# Altium PCB C2Sv1.PcbDoc (part 2 of 2)
Units mm, origin at the board's own origin, x right, y up, seen from the top; angles counter-clockwise.
Board outline 52 x 53 mm, 4 copper layers (Signal 1, GND, Power, Signal 2), stack 1.57 mm thick; 81 components, 85 nets, 351 pads, 170 vias.
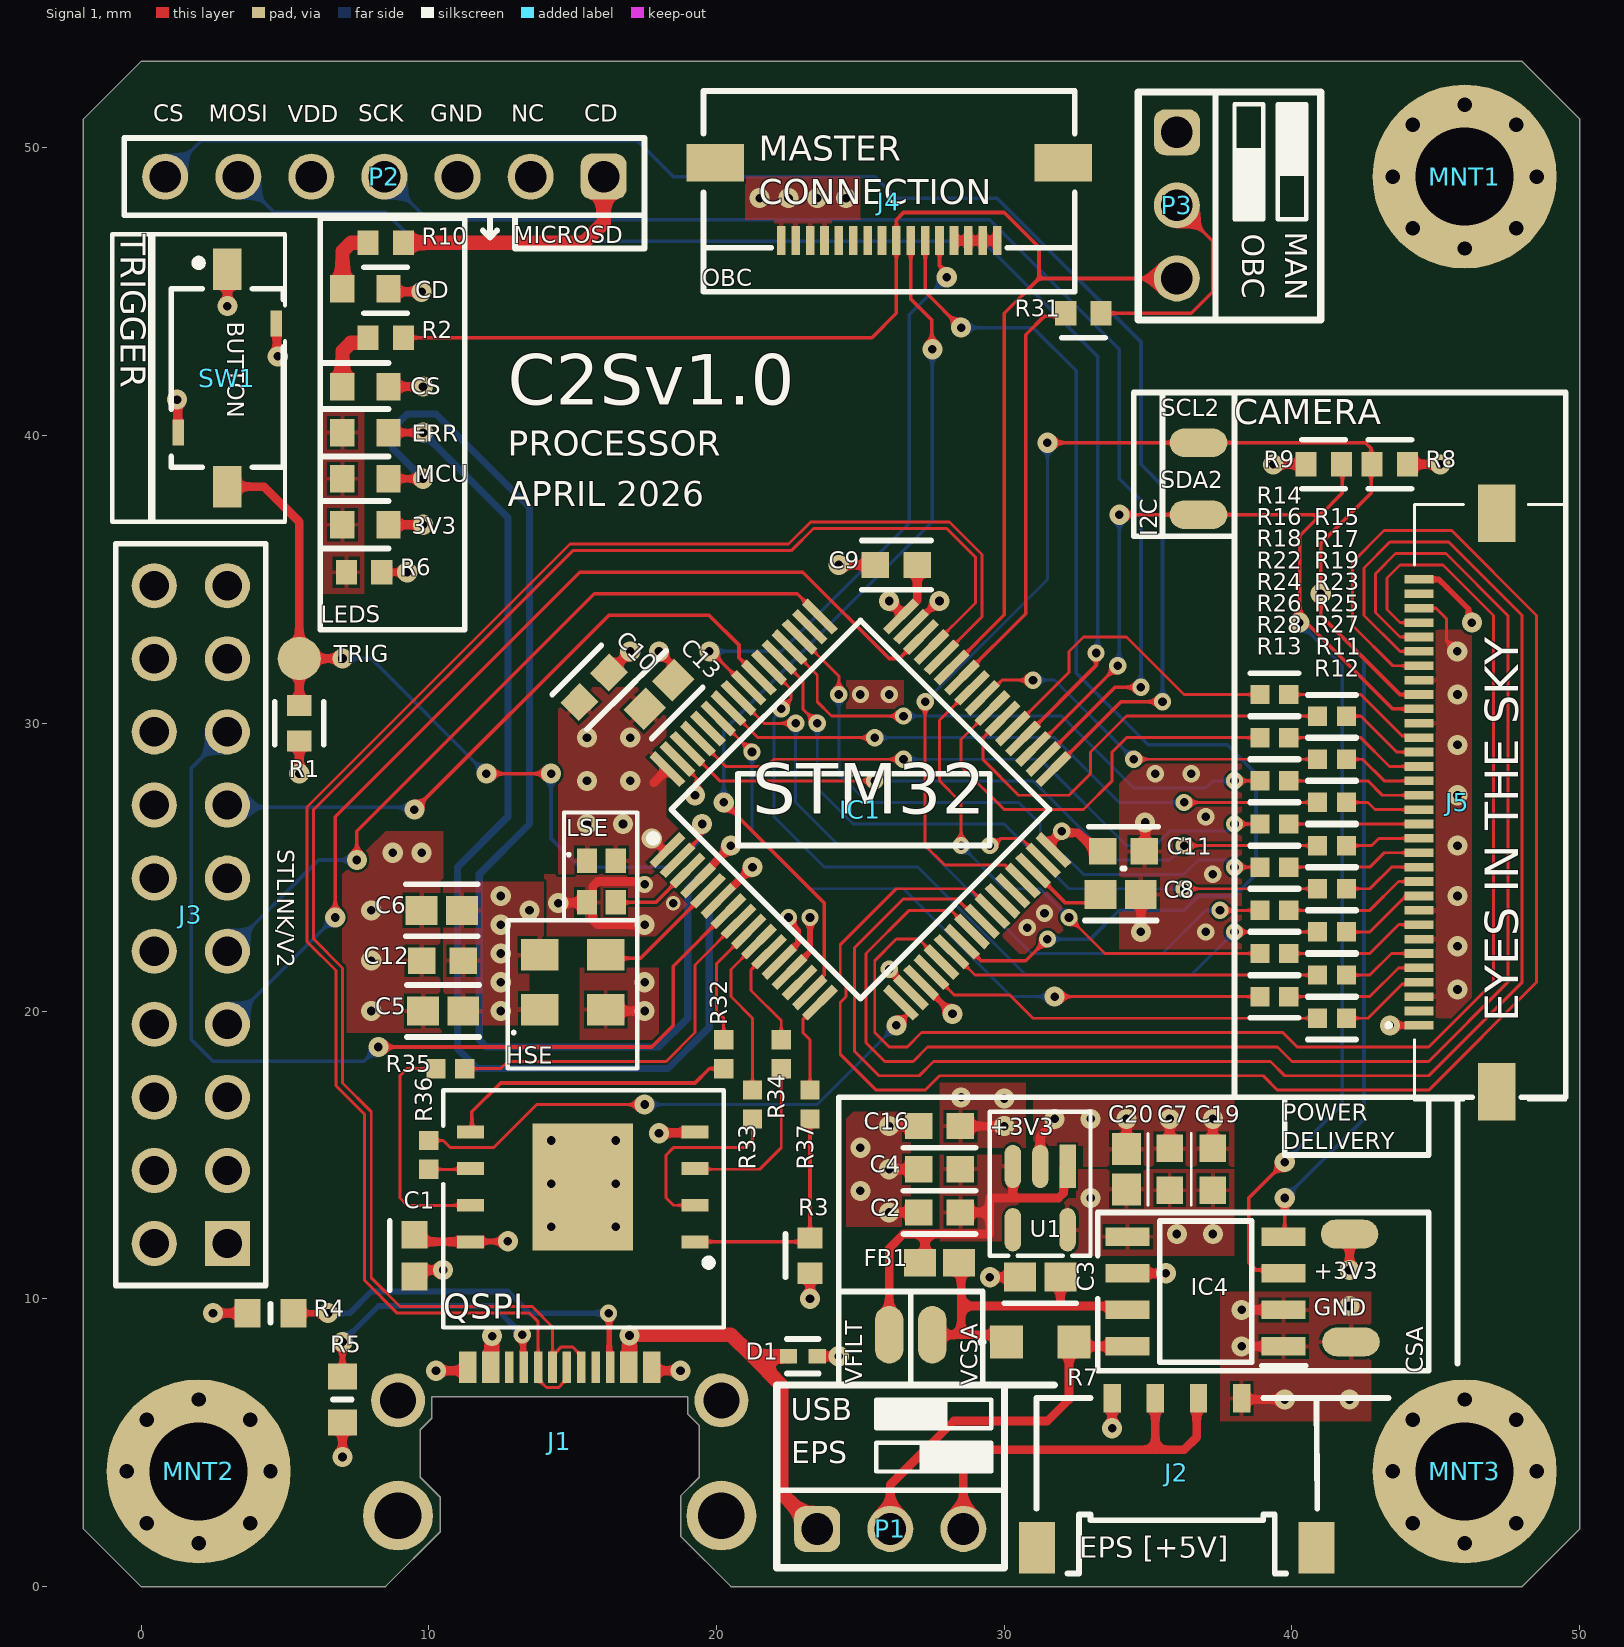
[diagram p0: Signal 1 view]

## Via types
v1: diameter 0.7, hole 0.3, Signal 1 to Signal 2, tented both sides, 125 vias
v2: diameter 0.6, hole 0.3, Signal 1 to Signal 2, tented both sides, 44 vias
v3: diameter 0.5, hole 0.3, Signal 1 to Signal 2, tented both sides, 1 vias

## Nets (pads, with @x,y where several pads share a name; then routed paths per layer and width w, separated by ;. In a path a pad name is that pad's centre, name@x,y a point inside that pad or via, vN(x,y) a via of type N, cw(c..) or ccw(c..) an arc to the next point about the centre after c; other vN are vias at no path point) (continued)
SPI2_CS: (continued)
  Signal 1 w0.127: IC1.33 34.053,30.75 v2(35.5,30.75)
  Signal 2 w0.127: P2.7 2.09,50.25 17.25,50.25 18.5,49 25.5,49 26.25,48.25 29.75,48.25 34.75,43.25 34.75,39 35.5,38.25 v2(35.5,30.75)
SPI2_MOSI: IC1.36 P2.6 | length 46.8
  Signal 1 w0.127: IC1.36 33.191,32.01 v2(33.191,32.441)
  Signal 2 w0.127: P2.6 4.63,47.75 8.5,47.75 9.5,46.75 29.25,46.75 33.25,42.75 33.25,32.5 v2(33.191,32.441)
SPI2_SCK: IC1.34 P2.4 | length 44.5
  Signal 1 w0.127: IC1.34 33.846,31.25 v2(34.75,31.25)
  Signal 2 w0.127: P2.4 9.96,47.5 29.5,47.5 34,43 34,38.5 34.75,37.75 v2(34.75,31.25)
SWCLK: IC1.49 J3.9 | length 26.7
  Signal 1 w0.127: v1(7.5,25.25) 7.5,26.25 15.75,34.5 22.803,34.5 IC1.49
  Signal 2 w0.127: J3.9 6.17,25.25 v1(7.5,25.25)
SWDIO: IC1.46 J3.7 | length 34.2
  Signal 1 w0.127: v1(6.75,23.25) 6.75,26.75 15.25,35.25 23,35.25 26,32.25 26.361,32.25 IC1.46
  Signal 2 w0.127: J3.7 3.02,19.54 6.73,23.25 v1(6.75,23.25)
SWO: IC1.55 J3.13 | length 22.5
  Signal 1 w0.127: v1(9.5,27) 16.25,33.75 19.75,33.75 20.78,32.72 20.78,32.28 IC1.55
  Signal 2 w0.127: J3.13 3.08,27.08 9.42,27.08 v1(9.5,27)
TRIG: IC1.2 R1.1 SW1.2 TRIG.1 | length 30.3
  Signal 1 w0.127: v1(12,28.25) v1(14.25,28.25) ; IC1.2 19.371,25.967 19.371,26.371 v1(19.5,26.5)
  Signal 1 w0.3: SW1.2 4.275,38.225 5.5,37 TRIG.1 ; R1.1@5.564,30.615 R1.1 TRIG.1 ; v1(7,32.25) TRIG.1
  Signal 2 w0.127: v1(7,32.25) 8,32.25 v1(12,28.25) ; v1(14.25,28.25) 14.25,26 15.25,25 18.5,25 19.409,25.909 19.409,26.41 v1(19.5,26.5)
USB_D_N: IC1.44 J1.A7 J1.B7 | length 59.8
  Signal 1 w0.102: J1.A7 14.801,7.215 14.604,7.018 14.604,7.002 14.514,6.913 14.088,6.913 13.888,7.113 13.888,7.529 J1.B7 13.801,9.199 13.5,9.5 8.905,9.5 7.771,10.634 7.771,16.405 6.771,17.405 6.771,21.405 5.771,22.405 5.771,27.095 14.905,36.229 22.5,36.229 23.271,37 28.095,37 29.229,35.866 29.229,33.703 IC1.44
USB_D_P: IC1.45 J1.A6 J1.B6 | length 58.4
  Signal 1 w0.102: J1.A6 J1.A6@14.301,8.015 ; J1.B6 15.301,8.015 15.104,8.213 15.104,8.228 15.014,8.317 14.588,8.317 14.498,8.228 14.498,8.212 J1.A6@14.301,8.015 ; IC1.45 29,34.182 29,35.771 28,36.771 23.366,36.771 22.595,36 15,36 6,27 6,22.5 7,21.5 7,17.5 8,16.5 8,10.729 9,9.729 13.595,9.729 14.301,9.022 J1.A6@14.301,8.015
VCSA: C3.1 FB1.1 IC4.7 R7.1 VCSA.1 | length 12.5
  Signal 1 w0.3: VCSA.1 28.5,8.75 ; FB1.1@28.426,11.5 28.5,11.426 28.5,9.75 ; R7.1@30.275,8.5 30.025,8.75 28.5,8.75 ; C3.1 31.951,9.799 31.901,9.75 ; IC4.7 34.154,9.75 31.901,9.75 ; 28.5,8.75 28.5,9.75 ; 28.5,9.75 31.901,9.75
VFILT: C2.1 C4.1 FB1.2 U1.1 U1.3 VFILT.1 | length 14.6
  Signal 1 w0.3: VFILT.1 26,11.75 26.5,12.25 27.25,12.25 ; FB1.2@27.074,11.5 27.25,11.676 27.25,12.25 ; C2.1 29.5,13 ; U1.3 30.3,13.55 30.25,13.5 ; U1.1@32.2,14.7 32.064,14.564 32.064,13.676 31.888,13.5 30.25,13.5 ; 27.25,12.25 29.5,12.25 29.5,13 ; 29.5,13 29.5,13.5 30.25,13.5
VSEL: IC4.8 P1.2 R7.2 | length 12.7
  Signal 1 w0.3: P1.2 26.04,3.54 28.25,5.75 31.5,5.75 32.25,6.5 32.25,8 32.595,8.345 IC4.8
pads on no net: IC1.14 IC1.27 IC1.28 IC1.50 IC1.60 J1.A8 J1.B8 J1.MH1 J1.MH2 J1.MH3 J1.MH4 J2.MP1 J2.MP2 J3.11 J3.17 J3.19 J4.9 J4.10 J4.11 J4.12 J4.17 J4.18 J5.2 J5.31 J5.MP1 J5.MP2 MNT1.1 MNT2.1 MNT3.1 P2.2 U1.4

## Polygon pours and split planes (outlines as drawn)
GND on Signal 1 "NONET_L-01_P-001" (solid, pour order 31): 43.933,33.25 43.933,19.75 46.25,19.75 46.25,33.25
GND on Signal 1 "NONET_L-01_P-001" (solid, pour order 30): 32.125,22.875 32.101,22.899 32.101,23.851 31.57,24.32 29.875,22.625 30.514,21.986 31.236,21.986
GND on Signal 1 "NONET_L-01_P-001" (solid, pour order 28): 24.5,31.5 24.5,30.5 26.5,30.5 26.5,31.5
GND on Signal 1 "NONET_L-01_P-001" (solid, pour order 26): 34.858,28.75 34,27.892 34,22 38.25,22 38.25,28.75
GND on Signal 1 "NONET_L-01_P-001" (solid, pour order 25): 18.127,22.602 19,23.475 19,24.75 14.011,24.75 14.011,22.602
GND on Signal 1 "NONET_L-01_P-001" (solid, pour order 13): 7,24.75 8.5,26.25 10.5,26.25 10.5,24.5 10.5,19.25 7,19.25
VFILT on Signal 1 "NONET_L-01_P-001" (solid, pour order 36): 27.75,15 27.75,12 30.5,12 30.5,15
+3V3 on Signal 1 "NONET_L-01_P-001" (solid, pour order 15): 30.75,15.25 27.75,15.25 27.75,17.5 30.75,17.5
GND on Signal 1 "NONET_L-01_P-001" (solid, pour order 9): 26.75,16.5 26.75,12.5 24.5,12.5 24.5,16.25 24.75,16.5
+3V3 on Signal 1 "NONET_L-01_P-001" (solid, pour order 0): 31.75,11.5 38,11.5 38,14.5 32.5,14.5 32.5,13.5 31.75,13.5
Net3V3_1 on Signal 1 "NONET_L-01_P-001" (solid, pour order 35): 7.75,41 6.25,41 6.25,34.5 7.75,34.5
GND on Signal 1 "NONET_L-01_P-001" (solid, pour order 24): 15.25,19 18,19 18,21.5 15.25,21.5
+3V3 on Signal 1 "NONET_L-01_P-001" (solid, pour order 20): 18.25,26.75 18.25,31.25 14.5,31.25 14.5,24.75 17.75,24.75 19,26
GND on Signal 1 "NONET_L-01_P-001" (solid, pour order 7): 38,14.5 38,17 31,17 31,15.32 32.75,15.32 32.75,14.5
GND on Signal 1 "NONET_L-01_P-001" (solid, pour order 3): 22,46.251 24,46.251 24,47.5 25,47.5 25,49 21,49 21,47.5 22,47.5
+3V3 on Signal 1 "NONET_L-01_P-001" (solid, pour order 12): 10.5,19.5 13.5,19.5 13.5,22.25 14,22.25 14,24.5 10.5,24.5
GND on Signal 1 "NONET_L-01_P-001" (solid, pour order 8): 42.75,10.25 42.75,5.75 37.5,5.75 37.5,10.25
GND on GND "NONET_L-01_P-001" (solid, pour order 2): -2,0 50,0 50,53 -2,53
+3V3 on Power "NONET_L-01_P-001" (solid, pour order 1): 18.75,0 10.4,0 -2,0 -2,53 50,53 50,0

## Silkscreen, mask and mechanical layers (free items; w line width, h text height)
Top Overlay:
  region: 0.5,47 0.25,47 0.25,37 0.5,37
  region: 39.5,51.517 39.5,49.017 40.5,49.017 40.5,51.517
  region: 38,50 38,47.517 39,47.517 39,50
  region: 29.551,4.995 27.051,4.995 27.051,3.995 29.551,3.995
  region: 28.034,6.495 25.551,6.495 25.551,5.495 28.034,5.495
  lines w0.1: 35,13.25 35,15.75 ; 36.5,13.25 36.5,15.75 ; 31.75,7 31.75,7
  lines w0.15: 5,43.273 5,37 -1,37 -1,47 5,47 5,44.526 ; 10.5,13.987 10.5,9 20.25,9 20.25,17.25 10.5,17.25 10.5,16.013 ; 30.137,11.5 29.5,11.5 29.5,16.5 33,16.5 33,11.5 32.363,11.5 ; 30.463,11.5 32.037,11.5 ; 17.25,23.15 12.75,23.15 12.75,18 17.25,18 17.25,23.15 ; 17.25,23.15 14.7,23.15 14.7,26.9 17.25,26.9 17.25,23.15 ; 25.551,3.995 25.551,4.995 29.551,4.995 29.551,3.995 25.551,3.995 ; 25.551,5.495 25.551,6.495 29.551,6.495 29.551,5.495 25.551,5.495 ; 38,47.517 38,51.517 39,51.517 39,47.517 38,47.517 ; 39.5,47.517 39.5,51.517 40.5,51.517 40.5,47.517 39.5,47.517
  lines w0.2: 11.875,47.125 12.125,46.875 ; 12.125,47.625 12.125,46.875 ; 21.9,46.526 19.552,46.526 19.552,45 32.452,45 32.452,46.526 30.103,46.526 ; 26.5,12.25 29,12.25 ; 26.5,13.75 29,13.75 ; 26.5,15.25 29,15.25 ; 33.25,10 33.25,7.5 44.75,7.5 44.75,13 33.25,13 33.25,11.5 ; 40.855,6.55 43.35,6.55 ; 45.25,17 24.25,17 24.25,7 ; 45.75,7.75 45.75,17 ; 46.261,17 38,17 38,41.5 ; 47.964,17 49.512,17 49.512,41.5 38,41.5 ; 12.125,46.875 12.375,47.125 12.125,46.875 ; 24.25,7 24.25,10.25 ; 24.25,7 26.75,7 ; 24.25,7 29.25,7 ; 24.25,7 24.25,10.25 ; 24.25,10.25 26.75,10.25 ; 24.25,10.25 29.25,10.25 ; 26.75,7 26.75,10.25 ; 26.75,7 26.75,10.25 ; 26.75,7 29.25,7 ; 26.75,10.25 29.25,10.25 ; 29.25,7 29.25,10.25 ; 29.25,7 29.25,10.25 ; 35.5,36.5 35.5,41.5 ; 35.5,36.5 38,36.5 38,41.5 ; 35.5,36.5 34.5,36.5 34.5,41.5 35.5,41.5 ; 35.5,36.5 35.5,41.5 ; 35.5,41.5 38,41.5 ; 6.225,33.25 11.25,33.25 11.25,47.55 6.225,47.55 6.225,33.25 ; 13,46.5 17.5,46.5 17.5,47.655 13,47.655 13,46.5 ; 20.75,25.75 20.75,28.25 29.5,28.25 29.5,25.75 20.75,25.75 ; 39.75,15 39.75,17 44.75,17 44.75,15 39.75,15
  lines w0.25: 31.75,7 30.011,7 ; 30.011,7 22.091,7 22.091,0.655 30.011,0.655 30.011,7 ; 34.655,44.017 41,44.017 41,51.937 34.655,51.937 34.655,44.017
  text "CS" at 0.417,50.712 h1
  text "MOSI" at 2.352,50.712 h1
  text "VDD" at 5.105,50.7 h1
  text "SCK" at 7.548,50.712 h1
  text "GND" at 10.044,50.712 h1
  text "NC" at 12.864,50.712 h1
  text "CD" at 15.395,50.712 h1
  text "MASTER / CONNECTION" at 21.459,47.75 h1.5
  text "MAN" at 39.5,47.09 h1.3 r270
  text "OBC" at 38.015,47.021 h1.3 r270
  text "TRIGGER" at -1,47 h1.5 r270
  text "MICROSD" at 12.96,46.5 h1
  text "OBC" at 19.5,45 h1
  text "BUTTON" at 2.812,43.95 h1 r270
  text "C2Sv1.0" at 12.75,40.5 h3
  text "CAMERA" at 38,40.1 h1.5
  text "PROCESSOR" at 12.75,39 h1.5
  text "APRIL 2026" at 12.75,37.25 h1.5
  text "I2C" at 35.5,36.5 h1 r90
  text "LEDS" at 6.25,33.3 h1
  text "STM32" at 21.25,26.275 h3
  text "STLINK/V2" at 4.547,25.615 h1 r270
  text "EYES IN THE SKY" at 48.25,19.605 h2 r90
  text "+3V3" at 29.5,15.5 h1
  text "POWER / DELIVERY" at 39.681,15 h1
  text "CSA" at 44.75,7.425 h1 r90
  text "USB" at 22.583,5.515 h1.3
  text "EPS" at 22.605,4.015 h1.3
  text "EPS [+5V]" at 32.6,0.75 h1.25
Board Shape:
  lines w0.1: 50,2 50,51 48,53 0,53 -2,51 -2,2 0,0 8.5,0 10.4,1.9 10.4,3.1 9.7,3.8 9.7,5.45 10.1,5.85 10.1,6.6 19,6.6 19,6 19.4,5.6 19.4,3.8 18.75,3.15 18.75,1.75 20.5,0 48,0 50,2 ; 50,2 50,2